# Altium PCB PCB1_mirrored.PcbDoc
Units mm, origin at the board's own origin, x right, y up, seen from the top; angles counter-clockwise.
Board outline 215.26 x 100.58 mm, 2 copper layers (Top Layer, Bottom Layer); 21 components, 0 nets, 125 pads, 21 vias.
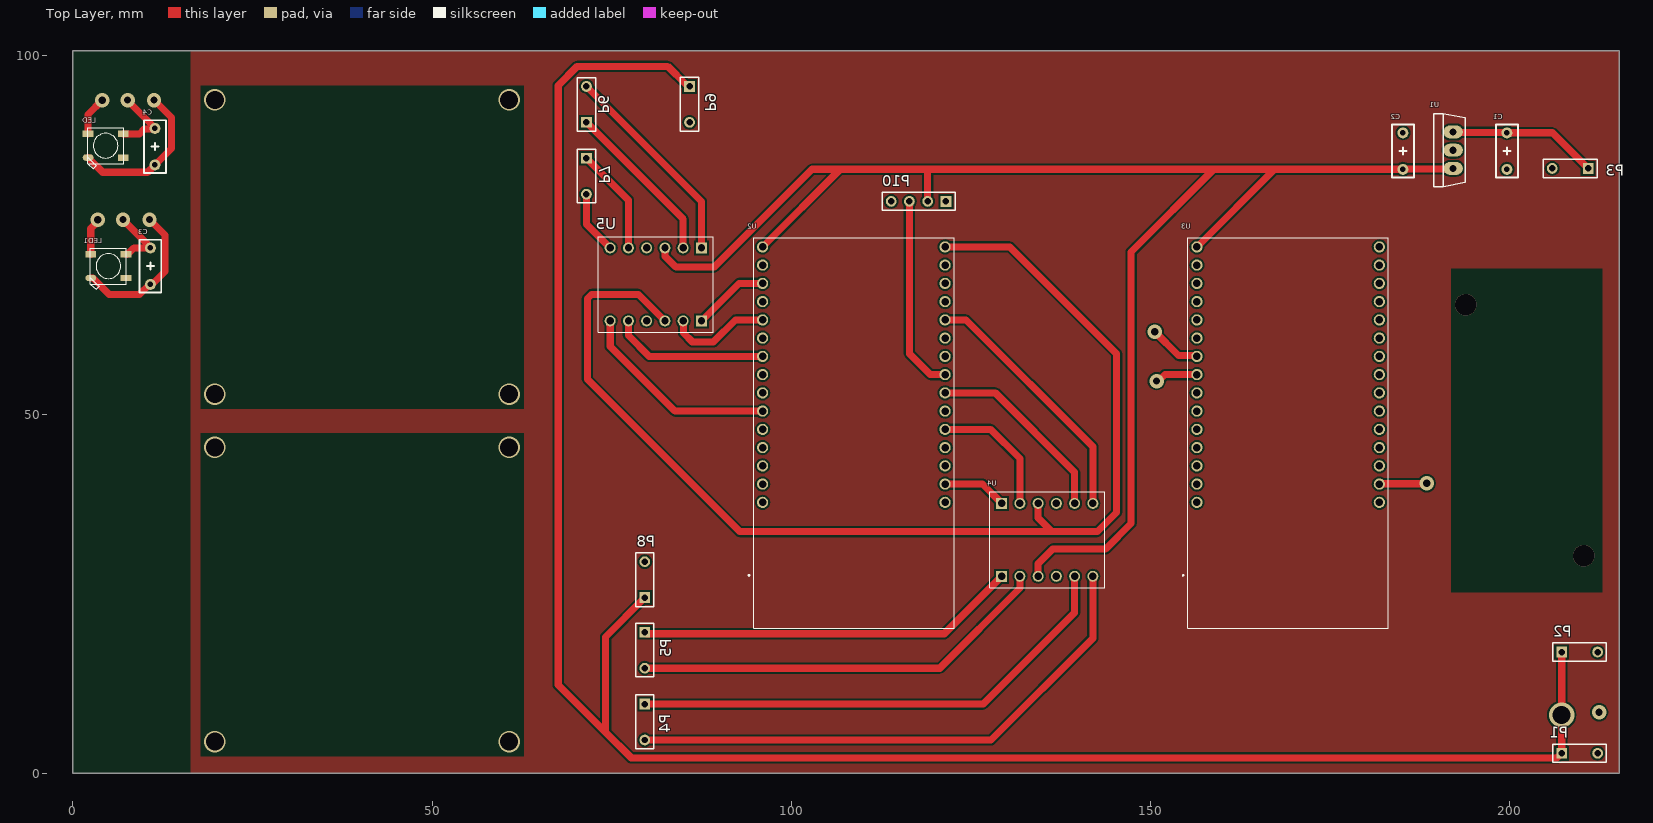
[diagram p0: Top Layer view]
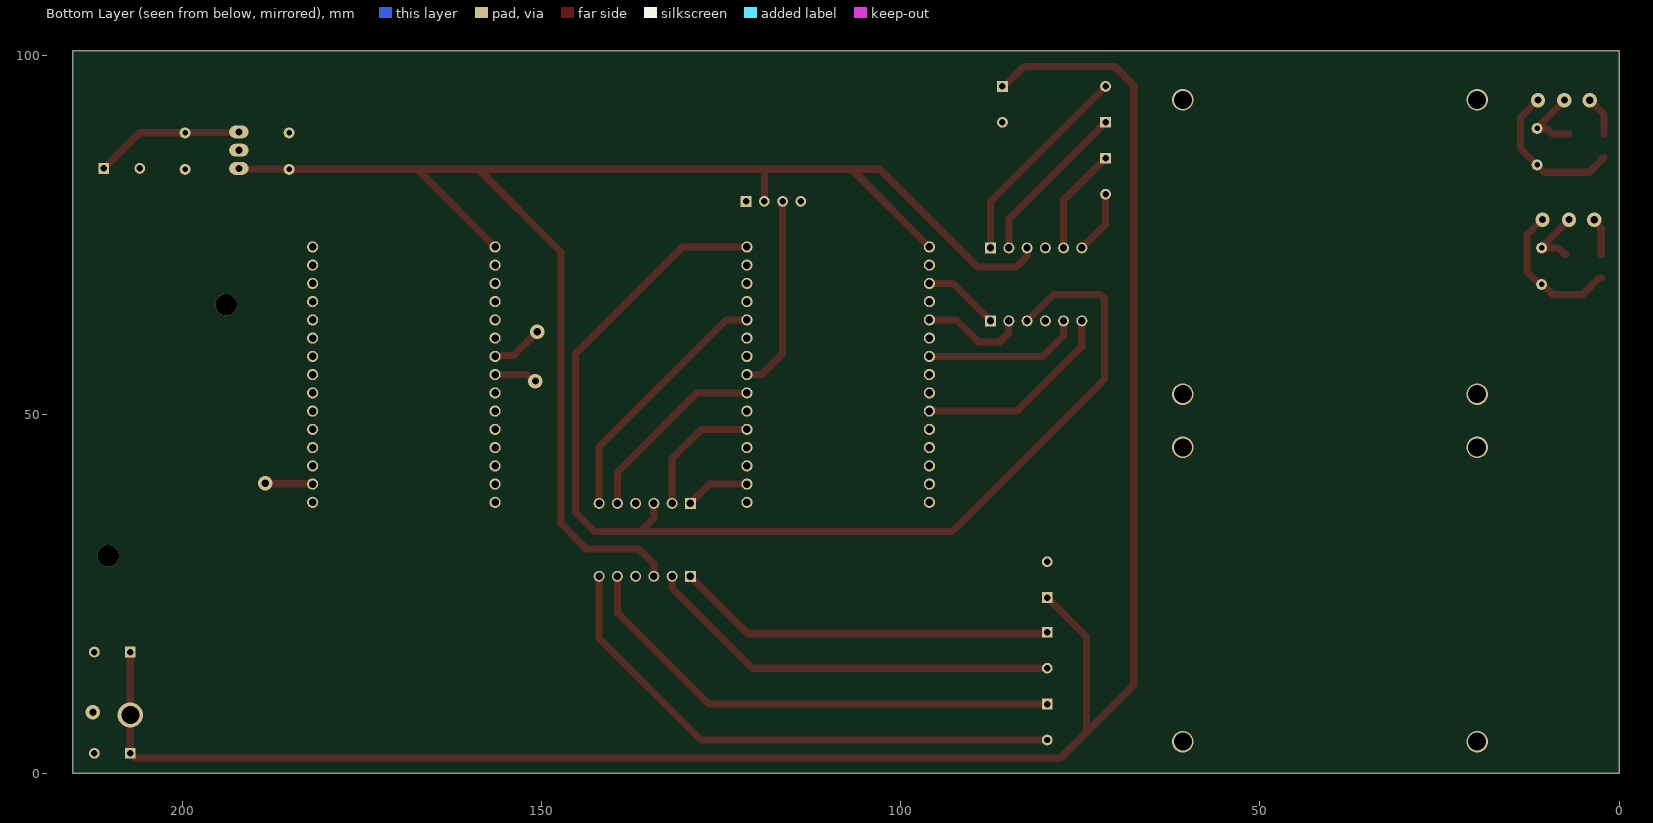
[diagram p1: Bottom Layer view, seen from below]

## Layer stack, top to bottom
Top Solder: solder mask 0.0102, Solder Resist, Dk 3.5
Top Layer: signal copper 0.0356
Dielectric 1: dielectric 0.32, FR-4, Dk 4.8
Bottom Layer: signal copper 0.0356
Bottom Solder: solder mask 0.0102, Solder Resist, Dk 3.5

## Board outline
215.265,0 0,0 0,100.584 215.265,100.584

## Design rules (kind name [scope] priority, off if disabled: settings)
Clearance [All] p1: gap=0.254 ignorepadtopadclearanceinfootprint=FALSE
PolygonConnect [All] p1: connectstyle=Relief reliefconductorwidth=0.254 reliefentries=4 polygonreliefangle="90 Angle" airgapwidth=0.254
RoutingVias [All] p1: holewidth=0.711 width=1.27 viastyle="Through Hole" minholewidth=0.711 minwidth=1.27 maxholewidth=0.711 maxwidth=1.27
SolderMaskExpansion [All] p1: expansion=0.102 istentingtop=FALSE
Width [All] p1: maxlimit=0.254 minlimit=0.254 preferedwidth=0.254
30 further rules are at their usual default settings.

## Components (designator, comment, footprint, x,y, rotation, side; value= is the part's Value field where it differs from the comment)
C1 "Cap Film 0.1uF" "Cap Film 0.1uF" 199.644,86.629 r90 top
C2 "Cap Film 0.1uF" "Cap Film 0.1uF" 185.166,86.629 r270 top
C3 "Cap Film 0.1uF" "Cap Film 0.1uF" 10.795,70.612 r90 top
C4 "Cap Film 0.1uF" "Cap Film 0.1uF" 11.43,87.249 r90 top
LED "WS2812B" WS2812B-LED 4.572,87.376 r0 top
LED1 "WS2812B" WS2812B-LED 4.953,70.612 r0 top
P1 "Header 1x2" KRE1X2 207.264,2.794 r0 top
P2 "Header 1x2" KRE1X2 207.264,16.891 r0 top
P3 "Header 1x2" KRE1X2 210.947,84.216 r180 top
P4 "Header 1x2" KRE1X2 79.629,9.644 r270 top
P5 "Header 1x2" KRE1X2 79.629,19.644 r270 top
P6 "Header 1x2" KRE1X2 71.501,90.631 r90 top
P7 "Header 1x2" KRE1X2 71.501,85.631 r270 top
P8 "Header 1x2" KRE1X2 79.629,24.464 r90 top
P9 "Header 1x2" KRE1X2 85.852,95.631 r270 top
P10 "Header 1x4" HDR1X4 121.539,79.629 r180 top
U1 "L7805" TO220AB 192.151,86.756 r270 top
U2 "ESP32-DEVKITC-32D" "MODULE_ESP32-DEVKITC-32D - duplicate" 108.727,47.331 r0 top
U3 "ESP32-DEVKITC-32D" "MODULE_ESP32-DEVKITC-32D - duplicate" 169.179,47.331 r0 top
U4 "Logic Level Shifter" CONV_BOB-12009 135.651,32.512 r270 top
U5 "Logic Level Shifter" CONV_BOB-12009 81.153,68.072 r90 top

## Footprints (in the part's own frame and the unit in brackets; to place one, negate y for a bottom-side part, rotate by r counter-clockwise, add the part's x,y. Pads: shape width x height; smd on the part's side, far side on the other; paste and mask are expansions set on the pad)
"Cap Film 0.1uF" [mil] "Cap Film 0.1uF"
  round 60 hole 30: 1(100,0) 2(-100,0)
  silkscreen extent -145,-60 145,60, body extent -144,-58 144,60, height 256
CONV_BOB-12009 [mil]
  round 60 hole 40: GND_1(200,50) GND_2(-200,50) HV(200,-50) HV2(200,-150) HV3(200,150) HV4(200,250) LV(-200,-50) LV2(-200,-150) LV3(-200,150) LV4(-200,250)
  rect 60x60 / inner round 60 / far side rect 60x60 hole 40: HV1(200,-250) LV1(-200,-250)
  silkscreen extent -262,-316 262,316, body extent -262,-316 262,316, height 0
HDR1X4 [mm]
  rect 1.5x1.5 hole 0.9: 1(0,0)
  round 1.5 hole 0.9: 2(2.54,0) 3(5.08,0) 4(7.62,0)
  silkscreen extent -1.27,-1.27 8.89,1.27
KRE1X2 [mm]
  rect 1.5x1.5 hole 0.9: 1(0,0)
  round 1.5 hole 0.9: 2(5,0)
  silkscreen extent -1.27,-1.27 6.22,1.27
"MODULE_ESP32-DEVKITC-32D - duplicate" [mm]
  round 1.56 hole 1.04: J2-5(-12.7,-9.6) J2-6(-12.7,-7.06) J2-7(-12.7,-4.52) J2-8(-12.7,-1.98) J2-9(-12.7,0.56) J2-10(-12.7,3.1) J2-11(-12.7,5.64) J2-12(-12.7,8.18) J2-13(-12.7,10.72) J2-14(-12.7,13.26) J2-15(-12.7,15.8) J2-16(-12.7,18.34) J2-17(-12.7,20.88) J2-18(-12.7,23.42) J2-19(-12.7,25.96) J3-5(12.7,-9.6) J3-6(12.7,-7.06) J3-7(12.7,-4.52) J3-8(12.7,-1.98) J3-9(12.7,0.56) J3-10(12.7,3.1) J3-11(12.7,5.64) J3-12(12.7,8.18) J3-13(12.7,10.72) J3-14(12.7,13.26) J3-15(12.7,15.8) J3-16(12.7,18.34) J3-17(12.7,20.88) J3-18(12.7,23.42) J3-19(12.7,25.96)
  silkscreen extent -14.7,-27.15 13.95,27.25, body extent -13.97,-27.2 13.97,27.9, height 6
TO220AB [mm]
  oval 1.8x2.7 hole 1: 1(-2.54,0) 2(0,0) 3(2.54,0)
  silkscreen extent -5.1,-2.7 5.1,1.7, body extent -5.15,-2.73 5.15,1.78, height 24.78
WS2812B-LED [mm]
  rect 1.5x0.9 smd: 1-VDD(2.45,1.65) 2-DOUT(2.45,-1.65) 4-DIN(-2.45,1.65)
  oval 1.5x0.9 smd: 3-GND(-2.45,-1.65)
  silkscreen extent -2.5,-3.2 2.5,2.5

## Part data
C1 C2 C3 C4: library part "Cap Film 0.1uF - B32529C104K", "Cap Film 0.1uF 63V PET 10% (7.2 X 2.5 X 6.5mm) Radial 5mm 125C Bulk", Capacitance=100nF, Case/Package=Radial, Dielectric=PET, Insulation Resistance=15GR, Manufacturer="TDK EPCOS", Manufacturer Part Number=B32529C104K, Max Operating Temperature=125°C, Min Operating Temperature=-55°C, Package Quantity=2000, Supplier Part Number 1=21C0469, Tolerance=10%, Voltage Rating=63V, Voltage Rating (AC)=40V, ComponentLink1Description=http://www.farnell.com/datasheets/8708.pdf?src-supplier=Element14, ComponentLink1URL=http://www.farnell.com/datasheets/8708.pdf?src-supplier=Element14, ComponentLink2Description=https://www.distrelec.biz/Web/Downloads/_t/ds/b3252x_eng_tds.pdf?mime=application%2Fpdf&src-supplier=Distrelec, ComponentLink2URL=https://www.distrelec.biz/Web/Downloads/_t/ds/b3252x_eng_tds.pdf?mime=application%2Fpdf&src-supplier=Distrelec, ComponentLink3Description=http://www.farnell.com/datasheets/1955213.pdf?src-supplier=Farnell, ComponentLink3URL=http://www.farnell.com/datasheets/1955213.pdf?src-supplier=Farnell, ComponentLink4Description=https://www.verical.com/server-webapp/html/getDatasheet?partID=117180&src-supplier=Verical, ComponentLink4URL=https://www.verical.com/server-webapp/html/getDatasheet?partID=117180&src-supplier=Verical, ComponentLink5Description=https://produktinfo.conrad.com/datenblaetter/500000-524999/500871-da-01-en-METALLPOLYESTER_KONDENSATOR_0_10_UF.pdf?src-supplier=Conrad, ComponentLink5URL=https://produktinfo.conrad.com/datenblaetter/500000-524999/500871-da-01-en-METALLPOLYESTER_KONDENSATOR_0_10_UF.pdf?src-supplier=Conrad, Contact Plating=Matte,Tin, Depth=2.5mm, Dielectric Material=PET, Height=6.5mm, Height - Seated (Max)=0.256inch, Lead Diameter=0.5mm, Lead Free="Lead Free", Lead Length=6mm, Lead Pitch=5mm, Length=7.2mm, Life (Hours)=200000Hour, Material=PVC,Resin, Mount="PCB,Through Hole", Number of Pins=2, Packaging=Bulk, Pitch=5mm, Radiation Hardening=No, REACH SVHC="No SVHC", Stock 1=0, Supplier 1=Newark, Termination=Radial, Voltage Rating (DC)=63V, Width=2.5mm
LED LED1: "Raspberry Pi HAT _40 pin_ Wheeled Robotics Kit", Package=None, Availability=Unavailable, MF="SparkFun Electronics", MP=WS2812B, Price=None, SnapEDA_Link=https://www.snapeda.com/parts/WS2812B/Worldsemi/view-part/1038297/?ref=snap
P1 P2 P3 P4 P5 P6 P7 P8 P9: Manufacturer=Cromax, Manufacturer Part Number=IMP10327, Supplier Part Number 1="Barra de Pinos Simples 1x40 Macho BMO40-1E", Accessory Type=-, Brand=Cromax, Category="Headers & Wire Housings", ComponentLink1Description=http://loja.multcomercial.com.br/barra-de-pinos-simples-1x40-macho-bmo40-1e.html, ComponentLink1URL=http://loja.multcomercial.com.br/barra-de-pinos-simples-1x40-macho-bmo40-1e.html, Contact Gender="Pin (Male)", Contact Plating=Gold, Contact Type=-, Minimum Order Quantity=1, Mounting Angle=Vertical, Mounting Style="Straight Pin", Number of Positions="40 Position", Number of Rows="1 Row", Pitch="2 mm", Pricing 1="1=1.00, 5=0.20 (BRL)", Product=Headers, Product Category=Accessories, Reeling=False, RoHS="RoHS Compliant", RoHS - Mouser=Y, Row Spacing=-, Stock 1=14, Supplier 1="Mult Comercial", Termination Style="Through Hole", Type=Breakaway
P10: "Headers & Wire Housings 40Pin 2mm Spacing Single Row Hdrs, 5pc", Manufacturer=Cromax, Manufacturer Part Number=IMP10327, Supplier Part Number 1="Barra de Pinos Simples 1x40 Macho BMO40-1E", Accessory Type=-, Brand=Cromax, Category="Headers & Wire Housings", ComponentLink1Description=http://loja.multcomercial.com.br/barra-de-pinos-simples-1x40-macho-bmo40-1e.html, ComponentLink1URL=http://loja.multcomercial.com.br/barra-de-pinos-simples-1x40-macho-bmo40-1e.html, Contact Gender="Pin (Male)", Contact Plating=Gold, Contact Type=-, Minimum Order Quantity=1, Mounting Angle=Vertical, Mounting Style="Straight Pin", Number of Positions="40 Position", Number of Rows="1 Row", Pitch="2 mm", Pricing 1="1=1.00, 5=0.20 (BRL)", Product=Headers, Product Category=Accessories, Reeling=False, RoHS="RoHS Compliant", RoHS - Mouser=Y, Row Spacing=-, Stock 1=14, Supplier 1="Mult Comercial", Termination Style="Through Hole", Type=Breakaway
U1: library part L7805CV, "Linear Voltage Regulators 5.0V 1.0A Positive", Input Voltage MAX="35 V", Input Voltage MIN="7 V", Manufacturer=STMicroelectronics, Maximum Operating Temperature="+ 125 C", Minimum Operating Temperature="0 C", Output Current="1.5 A", Output Voltage="5 V", Package / Case=TO-220, Supplier Part Number 1="Regulador de Tensão Linear L7805CV 5V 1A Positivo TO220 - STMicroelectronics - Cód. Loja 03", Brand=STMicroelectronics, Category="Linear Voltage Regulators", ComponentLink1Description=http://loja.multcomercial.com.br/regulador-de-tens-o-linear-l7805cv-5v-1a-positivo-stmicroelectronics-cod-loja-03.html, ComponentLink1URL=http://loja.multcomercial.com.br/regulador-de-tens-o-linear-l7805cv-5v-1a-positivo-stmicroelectronics-cod-loja-03.html, Line Regulation="100 mV", Load Regulation="100 mV", Manufacturer Part Number=L7805CV, Minimum Order Quantity=1, Mounting Style="Through Hole", Number of Outputs=1, Output Type=Fixed, Packaging=Tube, Polarity=Positive, Pricing 1="1=1.100 (BRL)", PSRR / Ripple Rejection - Typ="62 dB", Reeling=False, RoHS="RoHS Compliant", RoHS - Mouser=Y, Series=L7805, Standard Pack Qty=1000, Stock 1=26176, Supplier 1="Mult Comercial"
U2 U3: "WiFi Development Tools (802.11) ESP32 General Development Kit, ESP32-WROOM-32D on the board", Package=None, Check_prices=https://www.snapeda.com/parts/ESP32-DEVKITC-32D/Espressif+Systems/view-part/?ref=eda, MF="Espressif Systems", MP=ESP32-DEVKITC-32D, SnapEDA_Link=https://www.snapeda.com/parts/ESP32-DEVKITC-32D/Espressif+Systems/view-part/?ref=snap
U4 U5: "BSS138 - Logic-Level Translator Interface Evaluation Board", Package=None, Check_prices=https://www.snapeda.com/parts/BOB-12009/SparkFun/view-part/?ref=eda, MF=SparkFun, MP=BOB-12009, SnapEDA_Link=https://www.snapeda.com/parts/BOB-12009/SparkFun/view-part/?ref=snap

## Via types
v1: diameter 2, hole 1, Top Layer to Bottom Layer, 10 vias
v2: diameter 3, hole 2.5, Top Layer to Bottom Layer, 8 vias
v3: diameter 3, hole 3, Top Layer to Bottom Layer, 2 vias
v4: diameter 3.5, hole 2.5, Top Layer to Bottom Layer, 1 vias

## Nets (pads, with @x,y where several pads share a name; then routed paths per layer and width w, separated by ;. In a path a pad name is that pad's centre, name@x,y a point inside that pad or via, vN(x,y) a via of type N, cw(c..) or ccw(c..) an arc to the next point about the centre after c; other vN are vias at no path point)
pads on no net: C1.1 C1.2 C2.1 C2.2 C3.1 C3.2 C4.1 C4.2 LED1.1-VDD LED1.2-DOUT LED1.3-GND LED1.4-DIN LED.1-VDD LED.2-DOUT LED.3-GND LED.4-DIN P1.1 P1.2 P2.1 P2.2 P3.1 P3.2 P4.1 P4.2 P5.1 P5.2 P6.1 P6.2 P7.1 P7.2 P8.1 P8.2 P9.1 P9.2 P10.1 P10.2 P10.3 P10.4 U1.1 U1.2 U1.3 U2.J2-5 U2.J2-6 U2.J2-7 U2.J2-8 U2.J2-9 U2.J2-10 U2.J2-11 U2.J2-12 U2.J2-13 U2.J2-14 U2.J2-15 U2.J2-16 U2.J2-17 U2.J2-18 U2.J2-19 U2.J3-5 U2.J3-6 U2.J3-7 U2.J3-8 U2.J3-9 U2.J3-10 U2.J3-11 U2.J3-12 U2.J3-13 U2.J3-14 U2.J3-15 U2.J3-16 U2.J3-17 U2.J3-18 U2.J3-19 U3.J2-5 U3.J2-6 U3.J2-7 U3.J2-8 U3.J2-9 U3.J2-10 U3.J2-11 U3.J2-12 U3.J2-13 U3.J2-14 U3.J2-15 U3.J2-16 U3.J2-17 U3.J2-18 U3.J2-19 U3.J3-5 U3.J3-6 U3.J3-7 U3.J3-8 U3.J3-9 U3.J3-10 U3.J3-11 U3.J3-12 U3.J3-13 U3.J3-14 U3.J3-15 U3.J3-16 U3.J3-17 U3.J3-18 U3.J3-19 U4.GND_1 U4.GND_2 U4.HV U4.HV1 U4.HV2 U4.HV3 U4.HV4 U4.LV U4.LV1 U4.LV2 U4.LV3 U4.LV4 U5.GND_1 U5.GND_2 U5.HV U5.HV1 U5.HV2 U5.HV3 U5.HV4 U5.LV U5.LV1 U5.LV2 U5.LV3 U5.LV4
copper on no net: | length 1312
  Top Layer w1: 2.122,85.726 2.172,85.676 2.372,85.676 2.372,85.476 4.155,83.693 10.414,83.693 11.43,84.709 13.716,86.995 13.716,91.313 v1(11.303,93.726) ; 2.122,89.026 2.122,91.725 v1(4.097,93.7) ; 2.503,68.962 2.793,68.962 5.08,66.675 9.256,66.675 10.653,68.072 10.937,68.072 11.199,68.334 11.311,68.334 12.827,69.85 12.827,74.93 v1(10.668,77.089) ; 2.503,72.262 2.503,75.833 3.462,76.792 v1(3.462,77.063) ; v1(6.985,77.089) 6.985,77.064 10.795,73.254 10.795,73.152 8.493,73.152 7.603,72.262 7.403,72.262 ; 7.022,89.026 9.272,89.026 9.935,89.689 11.33,89.689 11.43,89.789 11.43,89.852 7.62,93.662 v1(7.62,93.726) ; 71.501,80.631 71.501,76.454 74.803,73.152 ; 71.501,85.631 77.343,79.789 77.343,73.152 ; 71.501,90.631 84.963,77.169 84.963,73.152 ; 71.501,95.631 87.503,79.629 87.503,73.152 ; 74.803,62.992 74.803,59.436 83.808,50.431 96.027,50.431 ; 77.343,62.992 77.343,60.96 80.252,58.051 96.027,58.051 ; 79.629,4.644 127.834,4.644 142.001,18.811 142.001,27.432 ; 79.629,9.644 126.738,9.644 139.461,22.367 139.461,27.432 ; 79.629,14.644 120.689,14.644 131.841,25.796 131.841,27.432 ; 79.629,19.644 79.842,19.431 121.3,19.431 129.039,27.17 129.301,27.432 ; 79.629,24.464 74.168,19.003 74.168,5.715 ; 82.423,62.992 78.74,66.675 72.214,66.675 71.628,66.089 71.628,54.864 92.837,33.655 136.286,33.655 ; 82.423,73.152 82.451,73.124 82.451,71.981 83.947,70.485 89.281,70.485 102.885,84.089 106.825,84.089 ; 84.963,62.992 85.013,62.942 85.013,61.291 86.233,60.071 89.197,60.071 92.257,63.131 96.027,63.131 ; 85.852,95.631 85.602,95.881 85.348,95.881 82.804,98.425 70.231,98.425 67.564,95.758 67.564,12.319 74.168,5.715 ; 87.503,62.992 92.722,68.211 96.027,68.211 ; 96.027,73.291 106.825,84.089 ; 116.459,79.629 116.459,58.42 119.368,55.511 121.427,55.511 ; 118.999,79.629 118.999,83.962 119.126,84.089 ; 121.427,40.271 126.622,40.271 129.301,37.592 ; 121.427,47.891 127.765,47.891 131.841,43.815 131.841,37.592 ; 121.427,52.971 128.4,52.971 139.461,41.91 139.461,37.592 ; 121.427,63.131 124.336,63.131 142.001,45.466 142.001,37.592 ; 121.427,73.291 130.432,73.291 145.303,58.42 145.303,36.322 142.636,33.655 136.779,33.655 136.286,33.655 ; 134.381,27.432 134.381,29.21 136.413,31.242 143.779,31.242 147.32,34.783 147.32,72.597 158.812,84.089 ; 134.381,37.592 134.381,35.56 136.286,33.655 ; v1(150.622,61.468) 153.932,58.158 156.372,58.158 156.479,58.051 ; v1(150.876,54.61) 151.147,54.61 152.048,55.511 156.479,55.511 ; 156.479,73.291 167.277,84.089 167.386,84.089 ; 181.879,40.271 181.937,40.328 188.41,40.328 v1(188.468,40.386) ; 192.024,89.169 192.151,89.296 ; 192.088,89.233 199.581,89.233 199.644,89.169 205.994,89.169 210.947,84.216 ; 192.151,84.216 192.088,84.153 185.23,84.153 185.166,84.089 167.386,84.089 ; 207.264,16.891 207.264,2.794 206.629,2.159 77.724,2.159 74.168,5.715 ; 106.825,84.089 119.126,84.089 ; 119.126,84.089 158.812,84.089 ; 158.812,84.089 159.385,84.089 167.386,84.089
  other v1: 212.471,8.509
  other v2: 19.78,4.413 60.738,4.413 19.78,45.371 60.738,45.371 19.78,52.8 60.738,52.8 19.78,93.758 60.738,93.758
  other v3: 210.337,30.273 193.897,65.231
  other v4: 207.264,8.128

## Polygon pours and split planes (outlines as drawn)
no net on Top Layer (solid, pour order 0): 215.265,0 16.383,0 16.383,100.584 215.265,100.584

## Other copper
Top Layer:
  pour cut-out: 62.78,50.758 17.78,50.758 17.78,95.758 62.78,95.758
  pour cut-out: 62.78,2.371 17.78,2.371 17.78,47.371 62.78,47.371
  pour cut-out: 212.897,25.231 191.897,25.231 191.897,70.231 212.897,70.231

## Silkscreen, mask and mechanical layers (free items; w line width, h text height)
Mechanical 15:
  lines w0.254: 1.733,25.866 22.733,25.866 22.733,70.866 1.733,70.866 1.733,25.866 ; 151.85,3.006 151.85,48.006 196.85,48.006 196.85,3.006 151.85,3.006 ; 151.85,51.393 151.85,96.393 196.85,96.393 196.85,51.393 151.85,51.393

## Text inside footprints (layer, text, board x,y; h text height)
U1: Mechanical 29 "1" at 193.551,90.656 h0.7 r90